# Altium PCB nRF53_Module.PcbDoc
Units mm, origin at the board's own origin, x right, y up, seen from the top; angles counter-clockwise.
Board outline 13.97 x 22.35 mm, 3 copper layers (Top Layer, Mid-Layer 3, Bottom Layer); 33 components, 73 nets, 186 pads, 56 vias.
Unrouted connection lines stored in the file: 67.
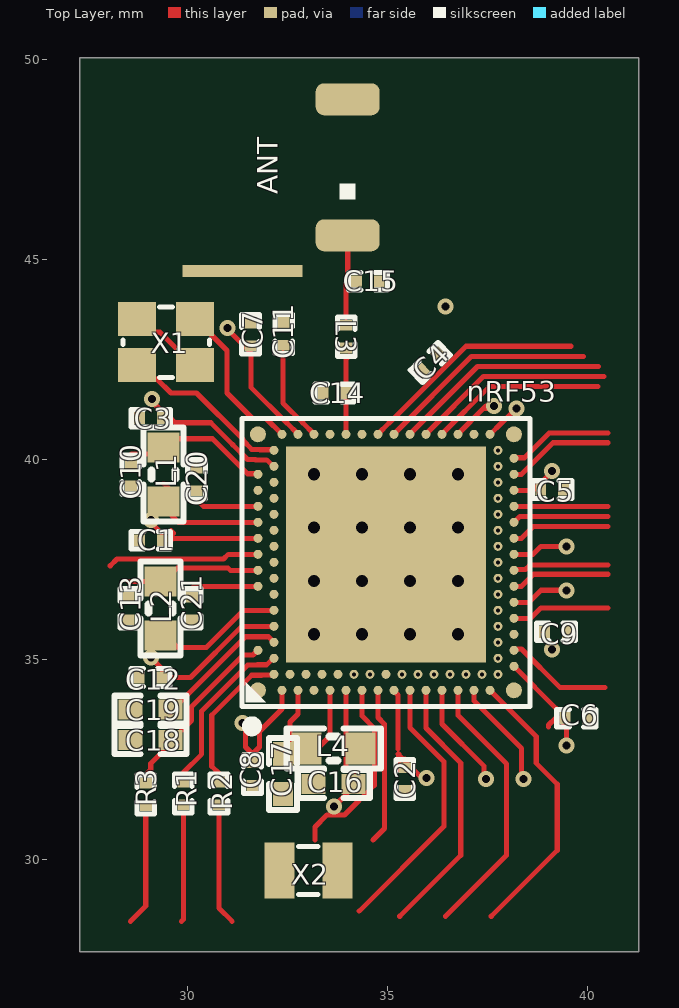
[diagram p0: Top Layer view]
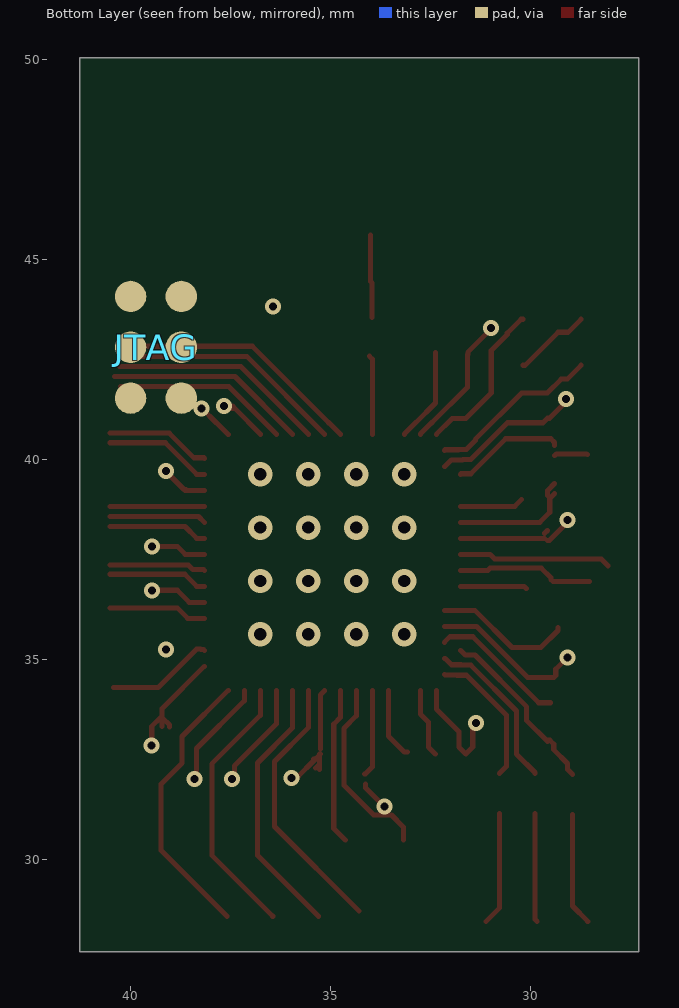
[diagram p1: Bottom Layer view, seen from below]
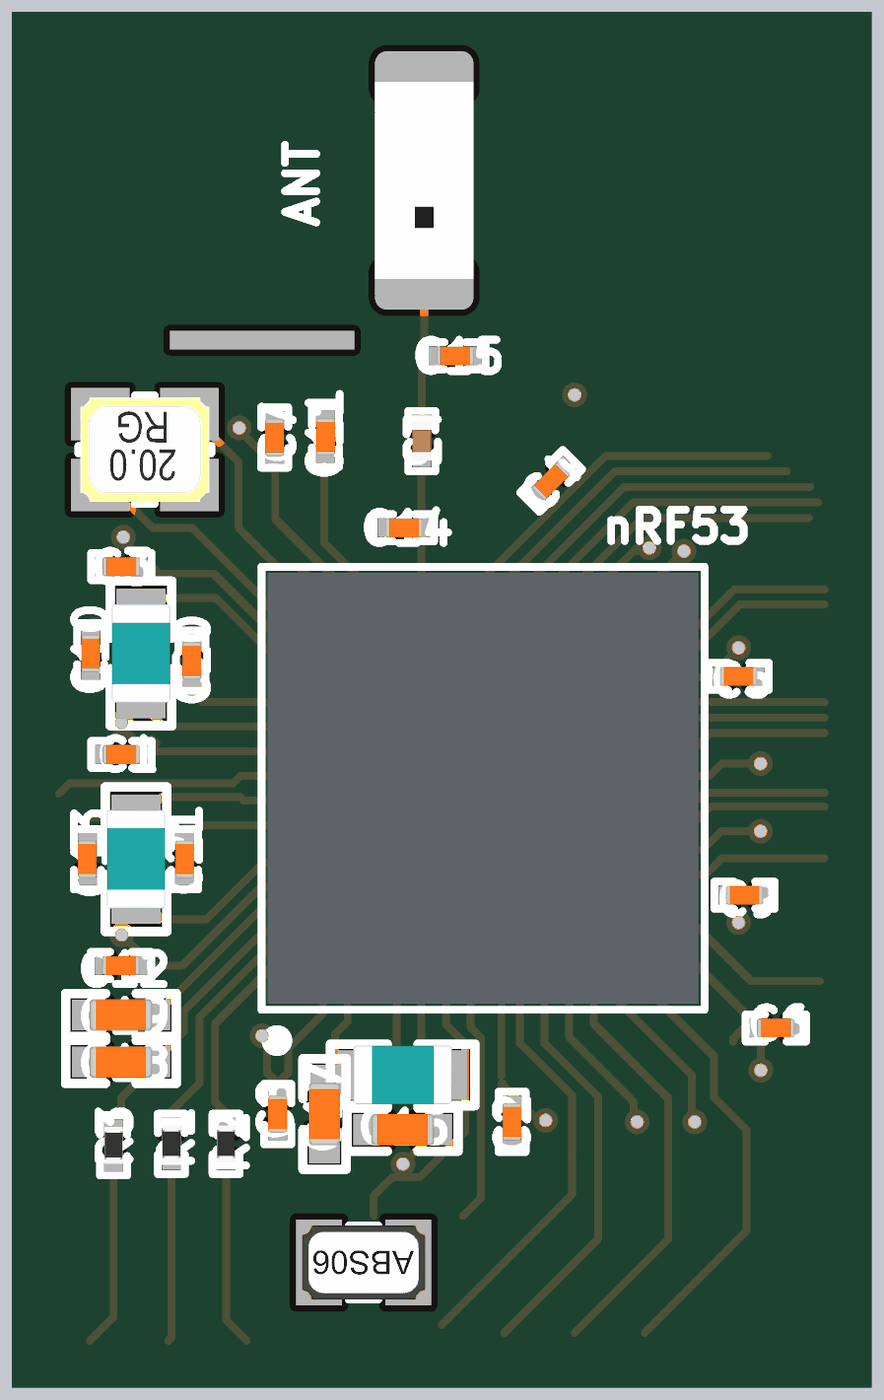
[diagram p2: 3D render of the assembled board from above, using the file's embedded part models]

## Layer stack, top to bottom
Top Solder: solder mask 0.0102, Solder Resist, Dk 3.5
Top Layer: signal copper 0.0356
Dielectric 1: dielectric 0.32, FR-4, Dk 4.8
Mid-Layer 3: signal copper 0.0356
Dielectric2: dielectric 0.32, FR-4, Dk 4.8
Bottom Layer: signal copper 0.0356
Bottom Solder: solder mask 0.0102, Solder Resist, Dk 3.5

## Board outline
27.305,27.686 41.275,27.686 41.275,50.038 27.305,50.038

## Design rules (kind name [scope] priority, off if disabled: settings)
Clearance [All] p1: gap=0.1 ignorepadtopadclearanceinfootprint=TRUE
ComponentClearance [All] p1 off: gap=0.254 collisioncheckmode=3 verticalgap=0.254 showdistances=FALSE
DiffPairsRouting [InDifferentialPair('DiffPair')] p1: maxlimit=0.254 minlimit=0.089 mostfreqgap=0.2 toplayer_minwidth=0.089 toplayer_maxwidth=0.381 toplayer_prefwidth=0.15 midlayer3_minwidth=0.089 midlayer3_maxwidth=0.381 midlayer3_prefwidth=0.15 bottomlayer_minwidth=0.089 bottomlayer_maxwidth=0.381 bottomlayer_prefwidth=0.15 maxuncoupledlength=12.7
HoleSize [All] p1 off: absolutevalues=TRUE maxlimit=2.54 minlimit=0.025 maxpercent=80.000 minpercent=20.000
HoleToHoleClearance [All] p1 off: gap=0.3 allowstackedmicrovias=TRUE
MatchedLengths usb [InDifferentialPair('USB')] p1: tolerance=1 checknetsindiffpair=FALSE checkdiffpairvsdiffpair=TRUE checkxsignals=TRUE checkothers=TRUE
MinimumAnnularRing [IsVia] p1: minimumring=0.076
MinimumSolderMaskSliver [All] p1 off: minsoldermaskwidth=0.254
PlaneConnect [InNet('NetC11_2')] p1: planeconnectstyle=Direct reliefexpansion=0.508 reliefentries=4 reliefconductorwidth=0.254 reliefairgap=0.254
PolygonConnect [All] p1: thpad.connectstyle=Relief thpad.reliefconductorwidth=0.254 thpad.reliefentries=4 thpad.polygonreliefangle="90 Angle" thpad.airgapwidth=0.254 smdpad.connectstyle=Relief smdpad.reliefconductorwidth=0.254 smdpad.reliefentries=4 smdpad.polygonreliefangle="90 Angle" smdpad.airgapwidth=0.254 via.connectstyle=Direct via.reliefconductorwidth=0.254 via.reliefentries=4 via.polygonreliefangle="90 Angle" via.airgapwidth=0.254
PolygonConnect 3V3MCU [InNet('NetC11_2')] p2: connectstyle=Direct reliefconductorwidth=0.254 reliefentries=4 polygonreliefangle="90 Angle" airgapwidth=0.254
PolygonConnect VBUSMCU [InNet('NetC12_2')] p3: connectstyle=Direct reliefconductorwidth=0.254 reliefentries=4 polygonreliefangle="90 Angle" airgapwidth=0.254
PolygonConnect VUSB [InNet('VUSB')] p4: connectstyle=Direct reliefconductorwidth=0 reliefentries=4 polygonreliefangle="90 Angle" airgapwidth=0
PolygonConnect viagnd [InNet('GND')] p5: thpad.connectstyle=Relief thpad.reliefconductorwidth=0.254 thpad.reliefentries=4 thpad.polygonreliefangle="90 Angle" thpad.airgapwidth=0.254 smdpad.connectstyle=Relief smdpad.reliefconductorwidth=0.254 smdpad.reliefentries=4 smdpad.polygonreliefangle="90 Angle" smdpad.airgapwidth=0.254 via.connectstyle=Direct via.reliefconductorwidth=0.254 via.reliefentries=4 via.polygonreliefangle="90 Angle" via.airgapwidth=0.254
RoutingVias [All] p1: holewidth=0.2 width=0.4 viastyle="Through Hole" minholewidth=0.1 minwidth=0.2 maxholewidth=6.3 maxwidth=1.27
SilkToSilkClearance [All] p1 off: silktosilkclearance=0.254
SilkToSolderMaskClearance [IsPad] p1 off: minsilkscreentomaskgap=0.254 clearancetoexposedcopper=TRUE
SolderMaskExpansion [All] p1: expansion=0.102 istentingtop=FALSE
Width [All] p1: maxlimit=1 minlimit=0.081 preferedwidth=0.15
22 further rules are at their usual default settings.

## Components (designator, comment, footprint, x,y, rotation, side; value= is the part's Value field where it differs from the comment)
ANT "2450AT18D0100" AMCA31-2R450G-S1F-T3 34.005,45.6 r0 top
C1 "1uF" C0201 29.083,37.973 r0 top value=100pF
C2 "100nF" C0201 35.433,32.004 r90 top value=100pF
C3 "100nF" C0201 29.083,41.026 r0 top value=100pF
C4 "100nF" C0201 36.068,42.418 r225 top value=100pF
C5 "100nF" C0201 39.116,39.243 r180 top value=100pF
C6 "100nF" C0201 39.721,33.528 r180 top value=100pF
C7 "100nF" C0201 31.572,43.124 r270 top value=100pF
C8 "100nF" C0201 31.623,32.131 r90 top value=100pF
C9 "100nF" C0201 39.212,35.687 r180 top value=100pF
C10 "1uF" C0201 28.583,39.614 r90 top value=100pF
C11 "2.2nF" C0201 32.402,43.135 r270 top value=100pF
C12 "1uF" C0201 29.075,34.544 r0 top value=100pF
C13 "1uF" C0201 28.53,36.272 r90 top value=100pF
C14 "1.5pF" C0201 33.675,41.656 r0 top value=100pF
C15 "DNP" C0201 34.51,44.45 r180 top value=100pF
C16 "2.2uF" C0402 33.655,31.877 r0 top value=100pF
C17 "4.7uF" C0402 32.385,32.131 r90 top value=100pF
C18 "4.7uF" C0402 29.075,32.977 r0 top value=100pF
C19 "4.7uF" C0402 29.075,33.739 r0 top value=100pF
C20 "100nF" C0201 30.226,39.497 r270 top value=100pF
C21 "1uF" C0201 30.112,36.272 r90 top value=100pF
JTAG "DNP" "JTAG Pins 6" 39.37,44.069 r90 bottom value="Pin Header 2x5, 1.27mm"
L1 "10uH" IND0603 29.403,39.614 r270 top value=120R/0.55A
L2 "10uH" IND0603 29.321,36.272 r270 top value=120R/0.55A
L3 "3.9nH" IND0201 33.965,43.064 r90 top value=120R/0.55A
L4 "10uH" IND0603 33.655,32.766 r0 top value=120R/0.55A
nRF53 "nRF5340-QKAA" nRF5340 34.96,37.424 r90 top locked
R1 "22R" R0201 29.896,31.646 r270 top value=0R
R2 "22R" R0201 30.785,31.646 r270 top value=0R
R3 "4R7" R0201 28.956,31.623 r270 top value=0R
X1 "32MHz" XTAL_2016 29.464,42.926 r180 top
X2 "32.768kHz" XTAL_2012 33.02,29.718 r180 top

## Footprints (in the part's own frame and the unit in brackets; to place one, negate y for a bottom-side part, rotate by r counter-clockwise, add the part's x,y. Pads: shape width x height; smd on the part's side, far side on the other; paste and mask are expansions set on the pad)
AMCA31-2R450G-S1F-T3 [mm] "Chip antenna 2.45Ghz"
  rrect50% 1.6x0.8 smd: 1(0,0) NC(0,3.4)
  silkscreen extent -0.2,0.9 0.2,1.3, body extent -0.8,0.1 0.8,3.3, height 1.4
C0201 [mm]
  rect 0.27x0.3 smd: 1(-0.285,0) 2(0.285,0)
  silkscreen extent -0.49,-0.22 0.49,0.22, body extent -0.3,-0.15 0.31,0.15, height 0.3
C0402 [mm]
  rect 0.6x0.5 smd: 1(-0.5,0) 2(0.5,0)
  silkscreen extent -0.9,-0.35 0.9,0.35, body extent -0.51,-0.25 0.51,0.25, height 0.5
IND0201 [mm]
  rect 0.27x0.3 smd: 1(-0.285,0) 2(0.285,0)
  silkscreen extent -0.49,-0.22 0.49,0.22, body extent -0.31,-0.16 0.31,0.16, height 0.26
IND0603 [mm]
  rect 0.75x0.8 smd: 1(-0.675,0) 2(0.675,0)
  silkscreen extent -1.17,-0.5 1.17,0.5, body extent -0.8,-0.48 0.8,0.48, height 0.8
"JTAG Pins 6" [mil] "TC2030-ALT-NL"
  round 31 smd paste-196.85: 1(-100,-25) 2(-100,25) 3(-50,-25) 4(-50,25) 5(0,-25) 6(0,25)
  Top Layer pour cut-out: -100,25 -100,-25 0,-25 0,25
nRF5340 [mm] "Nordic Semiconductor"
  rect 5.4x5 smd paste-5 mask+0.05: 104(0.2,0)
  round 0.4 smd paste+0.012 mask+0.05: A1(-3.2,3.2) A31(3.2,3.2) AL1(-3.2,-3.2) AL31(3.2,-3.2)
  round 0.225 smd paste+0.012 mask+0.05: A5(-2.2,3.2) A13(-0.6,3.2) A15(-0.2,3.2) A17(0.2,3.2) A19(0.6,3.2) A21(1,3.2) A23(1.4,3.2) A25(1.8,3.2) A27(2.2,3.2) AA1(-3.2,-1) AA31(3.2,-1) AB2(-2.8,-1.2) AC1(-3.2,-1.4) AC31(3.2,-1.4) AD2(-2.8,-1.6) AE1(-3.2,-1.8) AE31(3.2,-1.8) AF2(-2.8,-2) AG1(-3.2,-2.2) AG31(3.2,-2.2) AH2(-2.8,-2.4) AJ1(-3.2,-2.6) AJ31(3.2,-2.6) AK2(-2.8,-2.8) AK4(-2.4,-2.8) AK6(-2,-2.8) AK8(-1.6,-2.8) AK10(-1.2,-2.8) AK12(-0.8,-2.8) AK14(-0.4,-2.8) AK16(0,-2.8) AK18(0.4,-2.8) AK20(0.8,-2.8) AK22(1.2,-2.8) AK24(1.6,-2.8) AK26(2,-2.8) AK28(2.4,-2.8) AK30(2.8,-2.8) AL3(-2.6,-3.2) AL5(-2.2,-3.2) AL7(-1.8,-3.2) AL9(-1.4,-3.2) AL11(-1,-3.2) AL13(-0.6,-3.2) AL15(-0.2,-3.2) AL17(0.2,-3.2) AL19(0.6,-3.2) AL21(1,-3.2) AL23(1.4,-3.2) AL25(1.8,-3.2) AL27(2.2,-3.2) AL29(2.6,-3.2) B2(-2.8,2.8) B4(-2.4,2.8) B6(-2,2.8) B8(-1.6,2.8) B10(-1.2,2.8) B12(-0.8,2.8) B14(-0.4,2.8) B16(0,2.8) B18(0.4,2.8) B20(0.8,2.8) B22(1.2,2.8) B24(1.6,2.8) B26(2,2.8) B28(2.4,2.8) B30(2.8,2.8) C1(-3.2,2.6) C31(3.2,2.6) D2(-2.8,2.4) E1(-3.2,2.2) E31(3.2,2.2) F2(-2.8,2) G1(-3.2,1.8) G31(3.2,1.8) H2(-2.8,1.6) J1(-3.2,1.4) J31(3.2,1.4) K2(-2.8,1.2) L1(-3.2,1) L31(3.2,1) M2(-2.8,0.8) N1(-3.2,0.6) N31(3.2,0.6) P2(-2.8,0.4) R1(-3.2,0.2) R31(3.2,0.2) T2(-2.8,0) U1(-3.2,-0.2) U31(3.2,-0.2) V2(-2.8,-0.4) W1(-3.2,-0.6) W31(3.2,-0.6) Y2(-2.8,-0.8)
  rrect50% 1.1x1 on Top Paste: ""(-1.75,-1.8) ""(-1.75,-0.6) ""(-1.75,0.6) ""(-1.75,1.8) ""(-0.45,1.8) ""(-0.45,-0.6) ""(-0.45,0.6) ""(-0.45,-1.8) ""(0.85,1.8) ""(0.85,-0.6) ""(0.85,0.6) ""(0.85,-1.8) ""(2.15,-1.8) ""(2.15,-0.6) ""(2.15,0.6) ""(2.15,1.8)
  silkscreen extent -4.22,-3.6 3.6,3.6, body extent -3.5,-3.5 3.5,3.5, height 0.85
R0201 [mm]
  rect 0.27x0.3 smd: 1(-0.285,0) 2(0.285,0)
  silkscreen extent -0.49,-0.22 0.49,0.22, body extent -0.3,-0.15 0.3,0.15, height 0.23
XTAL_2012 [mm]
  rect 0.75x1.4 smd: 1(-0.725,0) 2(0.725,0)
  silkscreen extent -0.24,-0.6 0.24,0.6, body extent -1,-0.61 1,0.61, height 0.6
XTAL_2016 [mm]
  rect 0.95x0.85 smd: 1(-0.725,-0.575) 2(0.725,-0.575) 3(0.725,0.575) 4(-0.725,0.575)
  silkscreen extent -1.08,-0.88 1.08,0.88, body extent -1.05,-0.85 1.05,0.85, height 0.56

## Part data
ANT: "2.45 GHz chip antenna", Manufacturer="Johanson Technology", Part Number="Johanson 2450AT18D0100_STD-L", Part number IPS=N.A., Supplier Part Number 1=2450AT18D0100E, Artikkelnr Noca=53059035, ComponentLink1Description=Datasheet, ComponentLink2Description="Supplier link", Footprint Doc=2450AT18D0100, HelpURL=http://www.johansontechnology.com/datasheets/antennas/2450AT18D0100.pdf, LatestRevisionDate=2016-06-02, Manufacturer Part Number=2450AT18D0100, Pin Count=4, Published=2016-01-12, Publisher="Nordic Semiconductor", Supplier 1=Digi-Key, Supplier 2=Mouser, Supplier Part Number 2=609-2450AT18D0100E
C1 C2 C3 C4 C5 C6 C7 C8 C9 C10 C11 C12 C13 C14 C15 C16 C17 C18 C19 C20 C21: library part CAP, "Capacitor", Published=8-Jun-2000, Publisher="Altium Limited", Revision="July-2002: Re-released for DXP Platform."
JTAG: "Pin Header 2x5, 1.27mm (50mil), SMD, Keying Shroud", Manufacturer=W-CON, Manufacturer Part Number=3132-10MS0BK00R1, Part Number="Pin Header 2x5 SMD, 1.27mm, KS", Part number IPS=N.A., Artikkelnr Noca=55010009, ComponentLink1Description=Datasheet, ComponentLink2Description="Supplier link", Footprint Doc=HDR_2x5-SMD-1.27mm, HelpURL=\\hizz\pro\app9717\Datasheet\connectores\W-CON\3132-XXMXXBK00XX.pdf, LatestRevisionDate=2016-04-21, Pin Count=10, Published=2016-01-22, Publisher="Nordic Semiconductor", Supplier 1=Cabcon, Supplier 2=Samtec, Supplier Part Number 1=3132-10MS0BK00R1, Supplier Part Number 2=FTSH-105-01-F-DV-K
L1 L2 L3 L4: "Inductor", Manufacturer=Murata, Manufacturer Part Number=BLM15AG121SN1D, Part Number=FB0402-120R@100M-500mA, Part number IPS=N.A., Artikkelnr Noca=33029317, ComponentLink1Description=Datasheet, ComponentLink2Description="Supplier link", Footprint Doc=0402, HelpURL=http://search.murata.co.jp/Ceramy/image/img/PDF/ENG/L0110S0100BLM15A_SN.pdf, LatestRevisionDate=2014-01-10, Note="Chip EMIFIL Inductor Type Chip Ferrite Bead", Pin Count=2, Published=2011-11-14, Publisher="Nordic Semiconductor"
nRF53: "Multi-protocol Bluetooth Low Energy, IEEE 802.15.4, ANT and 2.4GHz proprietary system-on-chip", Manufacturer="Nordic Semiconductor", Part Number=nRF5340-QKAADA, Part number IPS=N.A., Artikkelnr Noca=N.A., ComponentLink1Description=Datasheet, ComponentLink2Description="Supplier link", Footprint Doc=AQFN-98, LatestRevisionDate=2019-03-28, Pin Count=98, Published=2017-01-09, Publisher="Nordic Semiconductor", Supplier 1="Nordic Semiconductor", Supplier Part Number 1=nRF5340-QKAADA
R1 R2 R3: "Resistor, ±5%, 0.05W", Part Number=R0201-0R, Part number IPS=00000003245, Artikkelnr Noca=N.A., ComponentLink1Description=Datasheet, ComponentLink2Description="Supplier link", Footprint Doc=0201, LatestRevisionDate=2017-11-09, Note="Chip Res 5%", Pin Count=2, Published=2014-11-13, Publisher="Nordic Semiconductor"
X1: "XTAL SMD 2016, 32MHz, Cl=8pF, Total Tol: ±40ppm", Part Number=XTAL_SMD2016_32MHz_8pF_General, Footprint Doc=XTAL_2016, LatestRevisionDate=2016-08-19, Pin Count=4, Published=2016-08-19, Publisher="Nordic Semiconductor"
X2: "XTAL SMD 32.768kHz, 9pF, ±20ppm", Manufacturer=NDK, Manufacturer Part Number=NX3215SA-32.768K-STD-MUA-9, Part Number=XTAL_SMD3215_32.768kHz_9pF_NDK, Part number IPS=N.A., Supplier Part Number 1=535-11937-6-ND, Artikkelnr Noca=22010049, ComponentLink1Description=Datasheet, ComponentLink2Description="Supplier link", Footprint Doc=XTAL_3215, LatestRevisionDate=2017-10-23, Note="XTAL SMD 32.768kHz", Pin Count=2, Published=2017-10-23, Publisher="Nordic Semiconductor", Supplier 1=Digi-Key

## Free pads (board coordinates)
  rect 3x0.3 smd: 1(31.369,44.704)

## Via types
v1: diameter 0.2, hole 0.1, Top Layer to Mid-Layer 3, tented both sides, 23 vias
v2: diameter 0.4, hole 0.2, Top Layer to Bottom Layer, tented both sides, 17 vias
v3: diameter 0.61, hole 0.305, Top Layer to Bottom Layer, tented both sides, 16 vias

## Nets (pads, with @x,y where several pads share a name; then routed paths per layer and width w, separated by ;. In a path a pad name is that pad's centre, name@x,y a point inside that pad or via, vN(x,y) a via of type N, cw(c..) or ccw(c..) an arc to the next point about the centre after c; other vN are vias at no path point)
EPROM_CS: nRF53.AK14
  other v1: 37.76,37.024
GND: C1.1 C2.1 C3.1 C4.1 C5.1 C6.1 C7.1 C8.1 C9.1 C10.1 C11.1 C12.1 C13.1 C14.1 C15.1 C16.1 C17.1 C18.1 C19.1 C20.1 C21.1 JTAG.3 nRF53.104 nRF53.A25 nRF53.B12 nRF53.B26 nRF53.G1 nRF53.H2 nRF53.J31 X1.2 X1.4 | length 1.9
  Top Layer w0.127: X1.2 29.064,43.176 29.314,43.176 30.139,42.351 X1.4
  other v3: 33.16,35.624 34.36,35.624 35.56,35.624 36.76,35.624 33.16,36.957 34.36,36.957 35.56,36.957 36.76,36.957 33.16,38.29 34.36,38.29 35.56,38.29 36.76,38.29 33.16,39.624 34.36,39.624 35.56,39.624 36.76,39.624
NetANT_1: ANT.1 C15.2 L3.2 | length 2.1
  Top Layer w0.127: 33.965,43.539 33.965,44.405 34.01,44.45 34.005,44.455 ANT.1
NetC10_2: C10.2 L1.1 nRF53.A27 | length 3.7
  Top Layer w0.127: 28.583,40.114 28.601,40.132 29.36,40.132 L1.1@29.403,40.089 ; L1.1@29.403,40.343 29.403,40.418 29.498,40.513 30.625,40.513 31.5,39.638 31.746,39.638 nRF53.A27
NetC11_2: C11.2 nRF53.G31 | length 2.4
  Top Layer w0.127: 32.383,42.665 32.383,41.407 32.878,40.912 32.88,40.912 33.16,40.632 nRF53.G31
NetC13_2: C13.2 L2.1 nRF53.A15 | length 3.4
  Top Layer w0.127: 28.53,36.947 29.446,36.947 29.495,36.995 29.495,37.037 29.736,37.278 31.017,37.278 31.071,37.224 nRF53.A15
NetC14_2: C14.2 L3.1 nRF53.L31 | length 2
  Top Layer w0.127: nRF53.L31 C14.2 33.96,42.502 34.036,42.578
NetC17_2: C17.2 nRF53.E1 | length 1.7
  Top Layer w0.127: C17.2 32.559,32.805 32.559,33.429 32.76,33.63 nRF53.E1
NetC18_2: C18.2 nRF53.A5 R3.1 | length 4.5
  Top Layer w0.127: 28.956,32.123 29.081,32.248 29.081,32.396 29.425,32.74 29.425,32.877 29.525,32.977 C18.2 ; C18.2@29.583,32.947 30.101,33.465 30.101,33.81 31.395,35.105 31.634,35.105 31.753,35.224 nRF53.A5
NetC19_2: C19.2 nRF53.B6 | length 3.4
  Top Layer w0.127: C19.2@29.51,33.912 29.8,33.912 31.45,35.562 32.021,35.562 nRF53.B6
NetC20_2: C20.2 nRF53.A23 | length 1.6
  Top Layer w0.127: 30.226,38.997 30.399,38.824 nRF53.A23
NetC21_2: C21.2 nRF53.A13 | length 1.7
  Top Layer w0.127: 30.112,36.772 30.164,36.824 nRF53.A13
NetL1_2: L1.2 nRF53.A21 | length 3.2
  Top Layer w0.127: L1.2@29.403,39.139 29.524,39.018 29.524,38.675 29.775,38.424 nRF53.A21 ; 29.403,39.393 29.577,39.219 L1.2@29.577,39.096
NetL2_2: L2.2 nRF53.B10 | length 3.5
  Top Layer w0.127: L2.2@29.321,35.797 29.321,35.722 29.747,35.295 30.469,35.295 31.398,36.224 nRF53.B10
NetL4_1: L4.1 nRF53.J1 | length 1.8
  Top Layer w0.127: L4.1@33.085,32.681 33.16,32.681 33.56,33.081 nRF53.J1
NetnRF53_B2: nRF53.B2 R2.1 | length 3.5
  Top Layer w0.127: 30.785,32.146 30.605,32.325 30.605,33.601 31.604,34.6 31.844,34.6 31.853,34.61 32.146,34.61 nRF53.B2
NetnRF53_B4: nRF53.B4 R1.1 | length 4.1
  Top Layer w0.127: 29.896,32.146 29.896,32.171 30.353,32.628 30.353,33.706 31.5,34.852 31.739,34.852 31.749,34.862 31.979,34.862 32.14,35.024 nRF53.B4
NetnRF53_B30: nRF53.B30 X1.3 | length 4.3
  Top Layer w0.127: X1.3 29.088,42.002 29.238,42.002 29.584,41.656 30.226,41.656 31.384,40.498 31.384,40.468 31.604,40.247 31.799,40.247 31.809,40.238 32.146,40.238 nRF53.B30
NetnRF53_C31: nRF53.C31 X1.1 | length 4
  Top Layer w0.127: X1.1 30.239,43.501 30.588,43.152 30.588,43.121 30.988,42.721 30.988,41.656 31.623,41.021 31.963,41.021 nRF53.C31
NetnRF53_N1: nRF53.N1 X2.2 | length 4.7
  Top Layer w0.127: 33.184,30.48 33.184,30.805 33.483,31.104 33.927,31.104 34.671,31.848 34.671,33.274 34.36,33.585 nRF53.N1
NetnRF53_R1: nRF53.R1 X2.1 | length 3.9
  Top Layer w0.127: 34.634,30.48 34.925,30.771 34.925,33.377 34.76,33.542 nRF53.R1
P0.02: nRF53.W1 | length 6.7
  Top Layer w0.127: 34.29,28.702 36.407,30.819 36.407,32.441 35.56,33.289 nRF53.W1
P0.03: nRF53.AA1 | length 6.6
  Top Layer w0.127: 35.306,28.575 36.83,30.099 36.83,32.409 35.96,33.279 nRF53.AA1
P0.04: nRF53.V2
  other v1: 35.36,34.624
P0.05: nRF53.Y2
  other v1: 35.76,34.624
P0.06: nRF53.AB2
  other v1: 36.16,34.624
P0.07: nRF53.AD2
  other v1: 36.56,34.624
P0.08: nRF53.AH2
  other v1: 37.36,34.624
P0.09: nRF53.AJ1 | length 7
  Top Layer w0.127: nRF53.AJ1 38.718,33.066 38.718,32.402 39.243,31.877 39.243,30.226 37.592,28.575
P0.10: nRF53.AK2
  other v1: 37.76,34.624
P0.12: nRF53.AK6
  other v1: 37.76,35.424
P0.19: nRF53.AL13 | length 2.5
  Top Layer w0.127: nRF53.AL13 38.349,36.824 38.65,37.125 40.513,37.125
P0.20: nRF53.AK16
  other v1: 37.76,37.424
P0.21: nRF53.AL15 | length 2.4
  Top Layer w0.127: nRF53.AL15 38.179,37.242 38.446,37.242 38.556,37.352 40.513,37.352
P0.22: nRF53.AK18
  other v1: 37.76,37.824
P0.23: nRF53.AK20
  other v1: 37.76,38.224
P0.24: nRF53.AL27 | length 2.7
  Top Layer w0.127: nRF53.AL27 38.349,39.624 39.137,40.412 40.513,40.412
P0.25: nRF53.AK28
  other v1: 37.76,39.824
P0.26: nRF53.AL29 | length 2.6
  Top Layer w0.127: nRF53.AL29 38.174,40.038 38.406,40.038 ; 38.422,40.036 39.037,40.651 40.513,40.651
P0.27: nRF53.AK30
  other v1: 37.76,40.224
P0.28: nRF53.AE31 | length 1.5
  Top Layer w0.127: nRF53.AE31 36.76,40.632 37.4,41.272 ; 37.4,41.272 37.608,41.272 v2(37.665,41.329) 37.457,41.329 37.4,41.272
P0.29: nRF53.U31 | length 5.5
  Top Layer w0.127: nRF53.U31 35.16,40.632 37.1,42.572 39.898,42.572
P0.30: nRF53.B24
P0.31: nRF53.B22
P1.00: nRF53.M2
  other v1: 34.16,34.624
P1.01: nRF53.P2
  other v1: 34.56,34.624
P1.02: nRF53.AE1 | length 6.8
  Top Layer w0.127: 36.449,28.575 37.973,30.099 37.973,32.385 36.76,33.598 nRF53.AE1
P1.03: nRF53.AF2
  other v1: 36.96,34.624
P1.04: nRF53.AL19 | length 2.5
  Top Layer w0.127: nRF53.AL19 38.349,38.024 38.644,38.319 40.513,38.319
P1.05: nRF53.AK22
  other v1: 37.76,38.624
P1.06: nRF53.AL21 | length 2.4
  Top Layer w0.127: nRF53.AL21 38.308,38.571 40.513,38.571
P1.07: nRF53.AK24
  other v1: 37.76,39.024
P1.08: nRF53.AL23 | length 2.4
  Top Layer w0.127: nRF53.AL23 40.513,38.824
P1.09: nRF53.AK26
  other v1: 37.76,39.424
P1.10: nRF53.R31 | length 5.7
  Top Layer w0.127: nRF53.R31 34.76,40.632 35.04,40.912 35.049,40.912 36.961,42.825 39.583,42.825
P1.11: nRF53.B20
P1.12: nRF53.B18
P1.13: nRF53.A17 | length 3.8
  Top Layer w0.127: 28.067,37.338 28.234,37.505 30.901,37.505 31.02,37.624 nRF53.A17
P1.14: nRF53.B16
P1.15: nRF53.B14
QSPI_DATA0: nRF53.AL5 | length 2.7
  Top Layer w0.127: nRF53.AL5 38.179,35.242 38.248,35.242 38.262,35.256 38.351,35.256 39.318,34.29 40.436,34.29
QSPI_DATA1: nRF53.AK8
  other v1: 37.76,35.824
QSPI_DATA2: nRF53.AK10
  other v1: 37.76,36.224
QSPI_DATA3: nRF53.AL9 | length 2.5
  Top Layer w0.127: nRF53.AL9 38.575,36.024 38.837,36.286 40.513,36.286
QSPI_SCK: nRF53.AK12
  other v1: 37.76,36.624
RESET: JTAG.5 nRF53.AC31 | length 4.4
  Top Layer w0.127: nRF53.AC31 36.36,40.632 37.543,41.815 40.259,41.815
SWDCLK: JTAG.4 nRF53.W31 | length 5.4
  Top Layer w0.127: nRF53.W31 35.56,40.632 37.248,42.32 40.278,42.32
SWDIO: JTAG.2 nRF53.AA31 | length 5
  Top Layer w0.127: nRF53.AA31 35.96,40.632 37.396,42.067 40.405,42.067
SWO: JTAG.6 nRF53.AK4
  other v1: 37.76,35.024
USB_N: R1.2 | length 2.7
  Top Layer w0.127: 29.845,28.448 29.896,28.499 29.896,31.146
USB_P: R2.2 | length 2.8
  Top Layer w0.127: 30.785,31.146 30.785,28.778 31.115,28.448
VDD_nRF: C1.2 C2.2 C3.2 C4.2 C5.2 C6.2 C7.2 C8.2 C9.2 C12.2 C16.2 JTAG.1 L4.2 nRF53.A19 nRF53.AC1 nRF53.AG1 nRF53.AJ31 nRF53.AL3 nRF53.AL7 nRF53.AL11 nRF53.AL17 nRF53.AL25 nRF53.B8 nRF53.B28 nRF53.C1 nRF53.E31 nRF53.L1 nRF53.N31 nRF53.U1 | length 37
  Top Layer w0.127: v2(29.083,38.487) 29.083,38.423 29.533,37.973 29.583,37.973 ; v2(29.114,41.504) 29.114,41.444 29.533,41.026 ; v2@29.133,34.994 v2(29.086,35.041) 29.375,34.752 29.375,34.592 29.423,34.544 29.575,34.544 30.075,34.544 31.355,35.824 nRF53.B8 ; 29.583,38.221 29.653,38.151 ; 29.583,41.026 29.696,40.912 30.582,40.912 31.131,40.363 31.5,39.995 31.694,39.995 31.704,39.985 31.979,39.985 32.14,39.824 nRF53.B28 ; 29.653,38.024 nRF53.A19 ; v2(30.997,43.279) 30.997,43.248 31.572,42.674 31.572,42.624 ; v2(31.369,33.401) 31.369,33.32 31.449,33.24 31.449,32.805 31.623,32.631 31.797,32.805 31.797,33.194 32.36,33.757 nRF53.C1 ; 31.583,42.624 31.583,41.801 32.471,40.912 32.48,40.912 32.76,40.632 nRF53.E31 ; v2(33.66,31.317) 34.13,31.787 C16.2@34.13,31.877 ; nRF53.L1 33.96,32.305 34.134,32.131 34.155,32.131 ; nRF53.U1 35.16,34.204 35.259,34.105 35.259,32.755 ; 35.259,32.628 35.433,32.454 ; 35.281,32.25 35.281,32.628 ; 35.281,32.377 C2.2@35.376,32.282 ; 35.433,32.504 35.433,32.454 ; v2(35.979,32.027) 35.931,32.075 35.812,32.075 35.433,32.454 ; nRF53.AC1 36.36,33.384 37.408,32.335 37.408,32.061 v2(37.465,32.004) ; nRF53.AG1 37.16,33.96 38.354,32.766 38.354,32.051 v2(38.401,32.004) ; nRF53.AJ31 37.567,40.624 37.847,40.904 37.856,40.904 v2(38.227,41.275) ; nRF53.AL3 39.221,33.763 39.221,33.528 39.221,33.325 ; nRF53.AL11 38.536,36.424 38.837,36.725 v2(39.471,36.725) ; nRF53.AL17 38.637,37.624 38.837,37.824 v2(39.471,37.824) ; nRF53.AL25 38.637,39.224 38.837,39.424 ; 38.616,39.243 38.666,39.243 v2@39.116,39.693 ; C5.2@38.756,39.333 v2@39.116,39.693 ; 39.027,33.304 39.027,33.354 39.201,33.528 39.251,33.528 39.271,33.528 39.475,33.324 v2(39.475,32.842) ; v2(39.116,39.708) v2@39.116,39.693
  other v2: 39.115,35.242 36.449,43.815
VIN: R3.2 | length 2.8
  Top Layer w0.127: 28.575,28.448 28.956,28.829 28.956,31.123
pads on no net: ANT.NC nRF53. nRF53.A1 nRF53.A31 nRF53.AG31 nRF53.AL1 nRF53.AL31 nRF53.D2 nRF53.F2 nRF53.K2 nRF53.T2

## Text inside footprints (layer, text, board x,y; h text height)
nRF53: Mechanical 5 "AG1" at 37.2,33.883 h0.51 r90; Mechanical 5 "AJ1" at 37.6,33.883 h0.51 r90; Mechanical 5 "AH2" at 37.4,34.216 h0.51 r90; Mechanical 5 "AK4" at 37.999,34.915 h0.51 r90; Mechanical 5 "AL5" at 38.399,35.109 h0.51 r90; Mechanical 5 "AK2" at 37.973,34.515 h0.51 r90; Mechanical 5 "AL3" at 38.399,34.709 h0.51 r90; Mechanical 5 "V2" at 35.4,34.296 h0.51 r90; Mechanical 5 "U1" at 35.2,33.955 h0.51 r90; Mechanical 5 "Y2" at 35.8,34.296 h0.51 r90; Mechanical 5 "AA1" at 36,33.889 h0.51 r90; Mechanical 5 "W1" at 35.6,33.955 h0.51 r90; Mechanical 5 "AD2" at 36.6,34.216 h0.51 r90; Mechanical 5 "AC1" at 36.4,33.883 h0.51 r90; Mechanical 5 "AE1" at 36.8,33.903 h0.51 r90; Mechanical 5 "AB2" at 36.2,34.216 h0.51 r90; Mechanical 5 "H2" at 33.4,34.296 h0.51 r90; Mechanical 5 "J1" at 33.6,33.955 h0.51 r90; Mechanical 5 "G1" at 33.2,33.955 h0.51 r90; Mechanical 5 "M2" at 34.2,34.296 h0.51 r90; Mechanical 5 "L1" at 34,33.935 h0.51 r90; Mechanical 5 "P2" at 34.6,34.296 h0.51 r90; Mechanical 5 "R1" at 34.8,33.968 h0.51 r90; Mechanical 5 "N1" at 34.4,33.974 h0.51 r90; Mechanical 5 "K2" at 33.8,34.296 h0.51 r90; Mechanical 5 "D2" at 32.6,34.296 h0.51 r90; Mechanical 5 "E1" at 32.8,33.974 h0.51 r90; Mechanical 5 "C1" at 32.4,33.955 h0.51 r90; Mechanical 5 "B4" at 31.999,34.955 h0.51 r90; Mechanical 5 "A5" at 31.599,35.151 h0.51 r90; Mechanical 5 "B2" at 32.013,34.571 h0.51 r90; Mechanical 5 "AK14" at 37.999,36.886 h0.51 r90; Mechanical 5 "AL13" at 38.399,36.679 h0.51 r90; Mechanical 5 "AK10" at 38,36.086 h0.51 r90; Mechanical 5 "AL11" at 38.399,36.279 h0.51 r90; Mechanical 5 "AK12" at 37.999,36.486 h0.51 r90; Mechanical 5 "AK8" at 37.999,35.715 h0.51 r90; Mechanical 5 "AL7" at 38.399,35.509 h0.51 r90; Mechanical 5 "AL9" at 38.399,35.879 h0.51 r90; Mechanical 5 "AL15" at 38.399,37.079 h0.51 r90; Mechanical 5 "B14" at 31.999,36.925 h0.51 r90; Mechanical 5 "A13" at 31.6,36.722 h0.51 r90; Mechanical 5 "B10" at 31.999,36.125 h0.51 r90; Mechanical 5 "B12" at 31.999,36.525 h0.51 r90; Mechanical 5 "B8" at 31.999,35.755 h0.51 r90; Mechanical 5 "A15" at 31.599,37.122 h0.51 r90; Mechanical 5 "AK24" at 37.999,38.886 h0.51 r90; Mechanical 5 "AL23" at 38.399,38.679 h0.51 r90; Mechanical 5 "AL25" at 38.399,39.079 h0.51 r90; Mechanical 5 "AK20" at 38,38.086 h0.51 r90; Mechanical 5 "AL21" at 38.399,38.279 h0.51 r90; Mechanical 5 "AK18" at 37.999,37.686 h0.51 r90; Mechanical 5 "AL17" at 38.399,37.479 h0.51 r90; Mechanical 5 "AL19" at 38.399,37.879 h0.51 r90; Mechanical 5 "AK22" at 37.999,38.486 h0.51 r90; Mechanical 5 "B24" at 31.999,38.925 h0.51 r90; Mechanical 5 "A23" at 31.6,38.722 h0.51 r90; Mechanical 5 "A25" at 31.599,39.122 h0.51 r90; Mechanical 5 "B20" at 31.999,38.125 h0.51 r90; Mechanical 5 "A21" at 31.6,38.322 h0.51 r90; Mechanical 5 "B18" at 31.999,37.725 h0.51 r90; Mechanical 5 "A17" at 31.599,37.522 h0.51 r90; Mechanical 5 "A19" at 31.599,37.922 h0.51 r90; Mechanical 5 "B22" at 31.999,38.525 h0.51 r90; Mechanical 5 "AL29" at 38.399,39.879 h0.51 r90; Mechanical 5 "AL27" at 38.399,39.479 h0.51 r90; Mechanical 5 "AK28" at 37.999,39.686 h0.51 r90; Mechanical 5 "AG31" at 37.2,40.746 h0.51 r90; Mechanical 5 "AJ31" at 37.6,40.746 h0.51 r90; Mechanical 5 "AK30" at 37.999,40.086 h0.51 r90; Mechanical 5 "U31" at 35.2,40.746 h0.51 r90; Mechanical 5 "AA31" at 36,40.746 h0.51 r90; Mechanical 5 "W31" at 35.6,40.746 h0.51 r90; Mechanical 5 "AC31" at 36.4,40.746 h0.51 r90; Mechanical 5 "AE31" at 36.8,40.746 h0.51 r90; Mechanical 5 "J31" at 33.6,40.746 h0.51 r90; Mechanical 5 "G31" at 33.2,40.746 h0.51 r90; Mechanical 5 "L31" at 34,40.746 h0.51 r90; Mechanical 5 "R31" at 34.8,40.746 h0.51 r90; Mechanical 5 "N31" at 34.4,40.746 h0.51 r90; Mechanical 5 "E31" at 32.8,40.746 h0.51 r90; Mechanical 5 "C31" at 32.4,40.746 h0.51 r90; Mechanical 5 "B30" at 31.999,40.125 h0.51 r90; Mechanical 5 "A27" at 31.599,39.522 h0.51 r90; Mechanical 5 "B28" at 31.999,39.725 h0.51 r90; Mechanical 5 "AF2" at 37,34.216 h0.51 r90; Mechanical 5 "F2" at 33,34.296 h0.51 r90; Mechanical 5 "T2" at 35,34.296 h0.51 r90; Mechanical 5 "AK6" at 37.999,35.315 h0.51 r90; Mechanical 5 "B6" at 31.999,35.355 h0.51 r90; Mechanical 5 "AK26" at 37.999,39.286 h0.51 r90; Mechanical 5 "AK16" at 37.999,37.286 h0.51 r90; Mechanical 5 "B26" at 31.999,39.325 h0.51 r90; Mechanical 5 "B16" at 31.999,37.325 h0.51 r90